# EAGLE board Home Automation (EAGLE 9.7.0)

Size 337.12 x 219.98 mm. Coordinates in mm from the lower left corner, seen from the top.
Outline: 0,0 337.12,0 337.12,219.98 0,219.98 0,0
Copper layers (1*16): Top 0.035mm / dielectric 1.5mm / Bottom 0.035mm
Design rules "default": minimum track width 6mil, minimum drill 0.35mm, track to track 6mil, track to pad 6mil, pad to pad 6mil, via to via 6mil, smd to smd 6mil, copper to edge 40mil, drill to drill 6mil, minimum pad ring 10mil, minimum via ring 8mil, stop-mask expansion 4mil, vias tented up to drill 0mil, thermal gap 10mil

## Footprints (pad centres in the part's own frame; a part is rotated, then mirrored left to right if it is on the bottom)
BATTERY-GENERIC = drill 1.118 pad 3.15 octagon: + 2.54,0; - -2.54,0
LEDRD254W60D565H860B = drill 0.981 pad 1.581: 1 -1.27,0; 2 1.27,0
MQ-XX-SOCKET = drill 1.27: 1 -6.223,6.223; 2 -8.788,0; 3 -6.223,-6.223; 4 6.223,-6.223; 5 8.788,0; 6 6.223,6.223
1X02 = drill 1.016 long: 1 -1.27,0; 2 1.27,0
MOTOR = drill 1.118 pad 3.15 octagon: + 2.54,0; - -2.54,0
28027 = drill 1.016 long: 1 -2.54,0; 2 0,0; 3 2.54,0
RESAD1016W63L850D250B = drill 0.83 pad 1.43: 1 -5.08,0; 2 5.08,0
SG90 = drill 1.016 long: 1 -2.54,0; 2 0,0; 3 2.54,0
ARDUINO-UNO-R3-SHIELD = drill 1.016 pad 1.88: 3.3V 24.13,-2.54; 5V 24.13,0; A0 24.13,12.7; A1 24.13,15.24; A2 24.13,17.78; A3 24.13,20.32; A4 24.13,22.86; A5 24.13,25.4; AREF -24.13,-13.97; D2 -24.13,20.32; D3 -24.13,17.78; D4 -24.13,15.24; D5 -24.13,12.7; D6 -24.13,10.16; D7 -24.13,7.62; D8 -24.13,3.81; D9 -24.13,1.27; D10 -24.13,-1.27; D11 -24.13,-3.81; D12 -24.13,-6.35; D13 -24.13,-8.89; GND@0 24.13,2.54; GND@1 24.13,5.08; GND@2 -24.13,-11.43; IOREF 24.13,-7.62; NC 24.13,-10.16; RES 24.13,-5.08; RX -24.13,25.4; SCL -24.13,-19.05; SDA -24.13,-16.51; TX -24.13,22.86; VIN 24.13,7.62
TO92 = drill 0.813 octagon: 1 -1.27,0; 2 0,1.905; 3 1.27,0
LCD-I2C = drill 1.016 long: 1 -19.05,-5.08; 2 -19.05,-7.62; 3 -19.05,-10.16; 4 -19.05,-12.7
TSOP48 = drill 0.8: 1 -2.54,0; 2 0,0; 3 2.54,0
DIP762W53P254L1969H508Q16B = drill 0.743 pad 1.343: 1 -3.81,8.89; 2 -3.81,6.35; 3 -3.81,3.81; 4 -3.81,1.27; 5 -3.81,-1.27; 6 -3.81,-3.81; 7 -3.81,-6.35; 8 -3.81,-8.89; 9 3.81,-8.89; 10 3.81,-6.35; 11 3.81,-3.81; 12 3.81,-1.27; 13 3.81,1.27; 14 3.81,3.81; 15 3.81,6.35; 16 3.81,8.89

## Placement (x,y rotation side)
BAT1  9V  [BATTERY-GENERIC]  312.92,70.61 270 top
D1  RED  [LEDRD254W60D565H860B]  220.02,195.69 180 top
GAS1  GAS-SENSORMQ-XX-SOCKET  [MQ-XX-SOCKET]  322.89,181.72 270 top
L1  LIGHTBULB  [1X02]  137.01,178.07 0 top
L2  LIGHTBULB  [1X02]  154.79,178.07 0 top
M1  MOTOR_HDR  [MOTOR]  267.06,8.26 0 top
PIR1  PIR-SENSOR_28027  [28027]  184,213.63 0 top
R1  4.7k  [RESAD1016W63L850D250B]  317.81,200.77 90 top
SERVO1  SERVOSG90  [SG90]  186.59,91.8 0 top
U1  ARDUINO-UNO-R3-SHIELD  [ARDUINO-UNO-R3-SHIELD]  129.15,68.63 270 top
U2  TMP36GT9Z_TO92  [TO92]  131.86,16.47 0 top
U3  LCD-16X2-I2CSUNFOUNDER-IIC  [LCD-I2C]  30.73,81.38 0 top
U4  IR-RECEIVERTSOP48  [TSOP48]  125.58,178.07 0 top
U6  L293E  [DIP762W53P254L1969H508Q16B]  265.7,67.99 90 top

## Library data of the parts
BAT1 GAS1 L1 L2 M1 PIR1 R1 SERVO1 U1-U4 U6 = Tinkercad
D1 = Tinkercad; CATEGORY: Opto-Electronic; SUB-CATEGORY: LED; VALUE: LED_RED

## Nets
BAT1+: BAT1.+ U6.8
BAT1-: BAT1.- D1.2 GAS1.2 L1.2 L2.2 PIR1.3 R1.2 SERVO1.1 U1.GND@0 U1.GND@1 U1.GND@2 U2.1 U3.1 U4.2 U6.4 U6.5 U6.12 U6.13
M1_+: M1.+ U6.6
M1_-: M1.- U6.3
U1_5V: GAS1.4 GAS1.5 GAS1.6 PIR1.2 SERVO1.2 U1.5V U2.3 U3.2 U4.3 U6.16
U1_A0: U1.A0 U2.2
U1_A1: GAS1.1 GAS1.3 R1.1 U1.A1
U1_D2: L2.1 U1.D2
U1_D3: SERVO1.3 U1.D3
U1_D4: PIR1.1 U1.D4
U1_D7: L1.1 U1.D7
U1_D8: U1.D8 U6.7
U1_D9: U1.D9 U6.2
U1_D10: U1.D10 U6.1
U1_D11: U1.D11 U4.1
U1_D13: D1.1 U1.D13
U1_SCL: U1.SCL U3.4
U1_SDA: U1.SDA U3.3

## Tracks (layer width: path | path; a pad name or v marks a point on that pad's centre or on a via)
BAT1+  (1 unrouted)
BAT1-  (17 unrouted)
M1_+  (1 unrouted)
M1_-  (1 unrouted)
U1_5V  (9 unrouted)
U1_A0  (1 unrouted)
U1_A1  (3 unrouted)
U1_D2  (1 unrouted)
U1_D3  (1 unrouted)
U1_D4  (1 unrouted)
U1_D7  (1 unrouted)
U1_D8  (1 unrouted)
U1_D9  (1 unrouted)
U1_D10  (1 unrouted)
U1_D11  (1 unrouted)
U1_D13  (1 unrouted)
U1_SCL  (1 unrouted)
U1_SDA  (1 unrouted)